# Altium PCB Digital Watch PCB.PcbDoc
Units mm, origin at the board's own origin, x right, y up, seen from the top; angles counter-clockwise.
Board outline 40 x 40 mm, 2 copper layers (Top Layer, Bottom Layer); 32 components, 24 nets, 122 pads, 2 vias.
Unrouted connection lines stored in the file: 58.
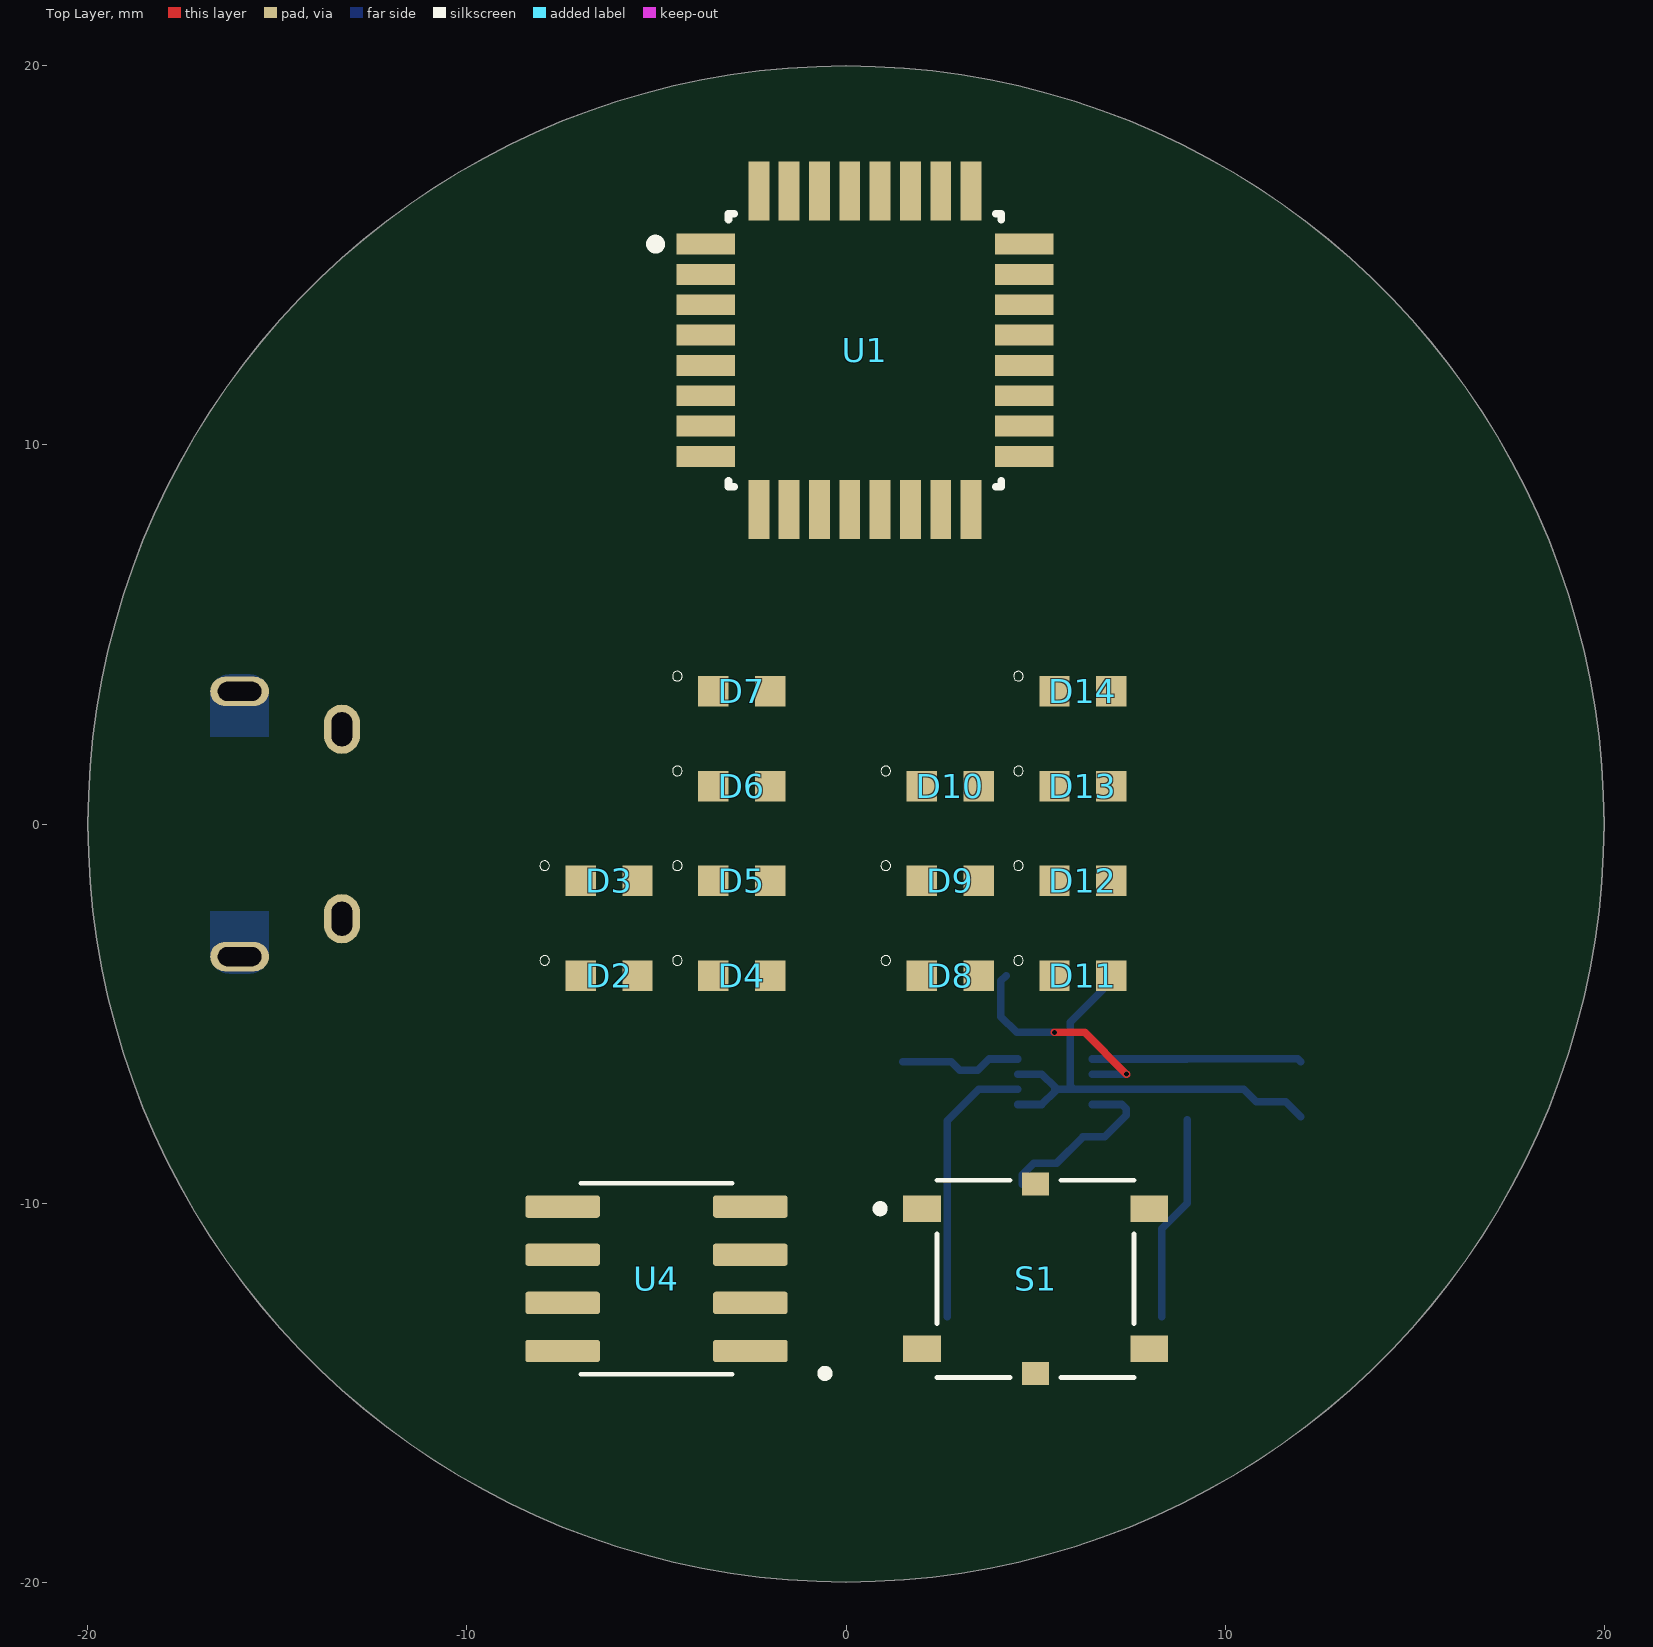
[diagram p0: Top Layer view]
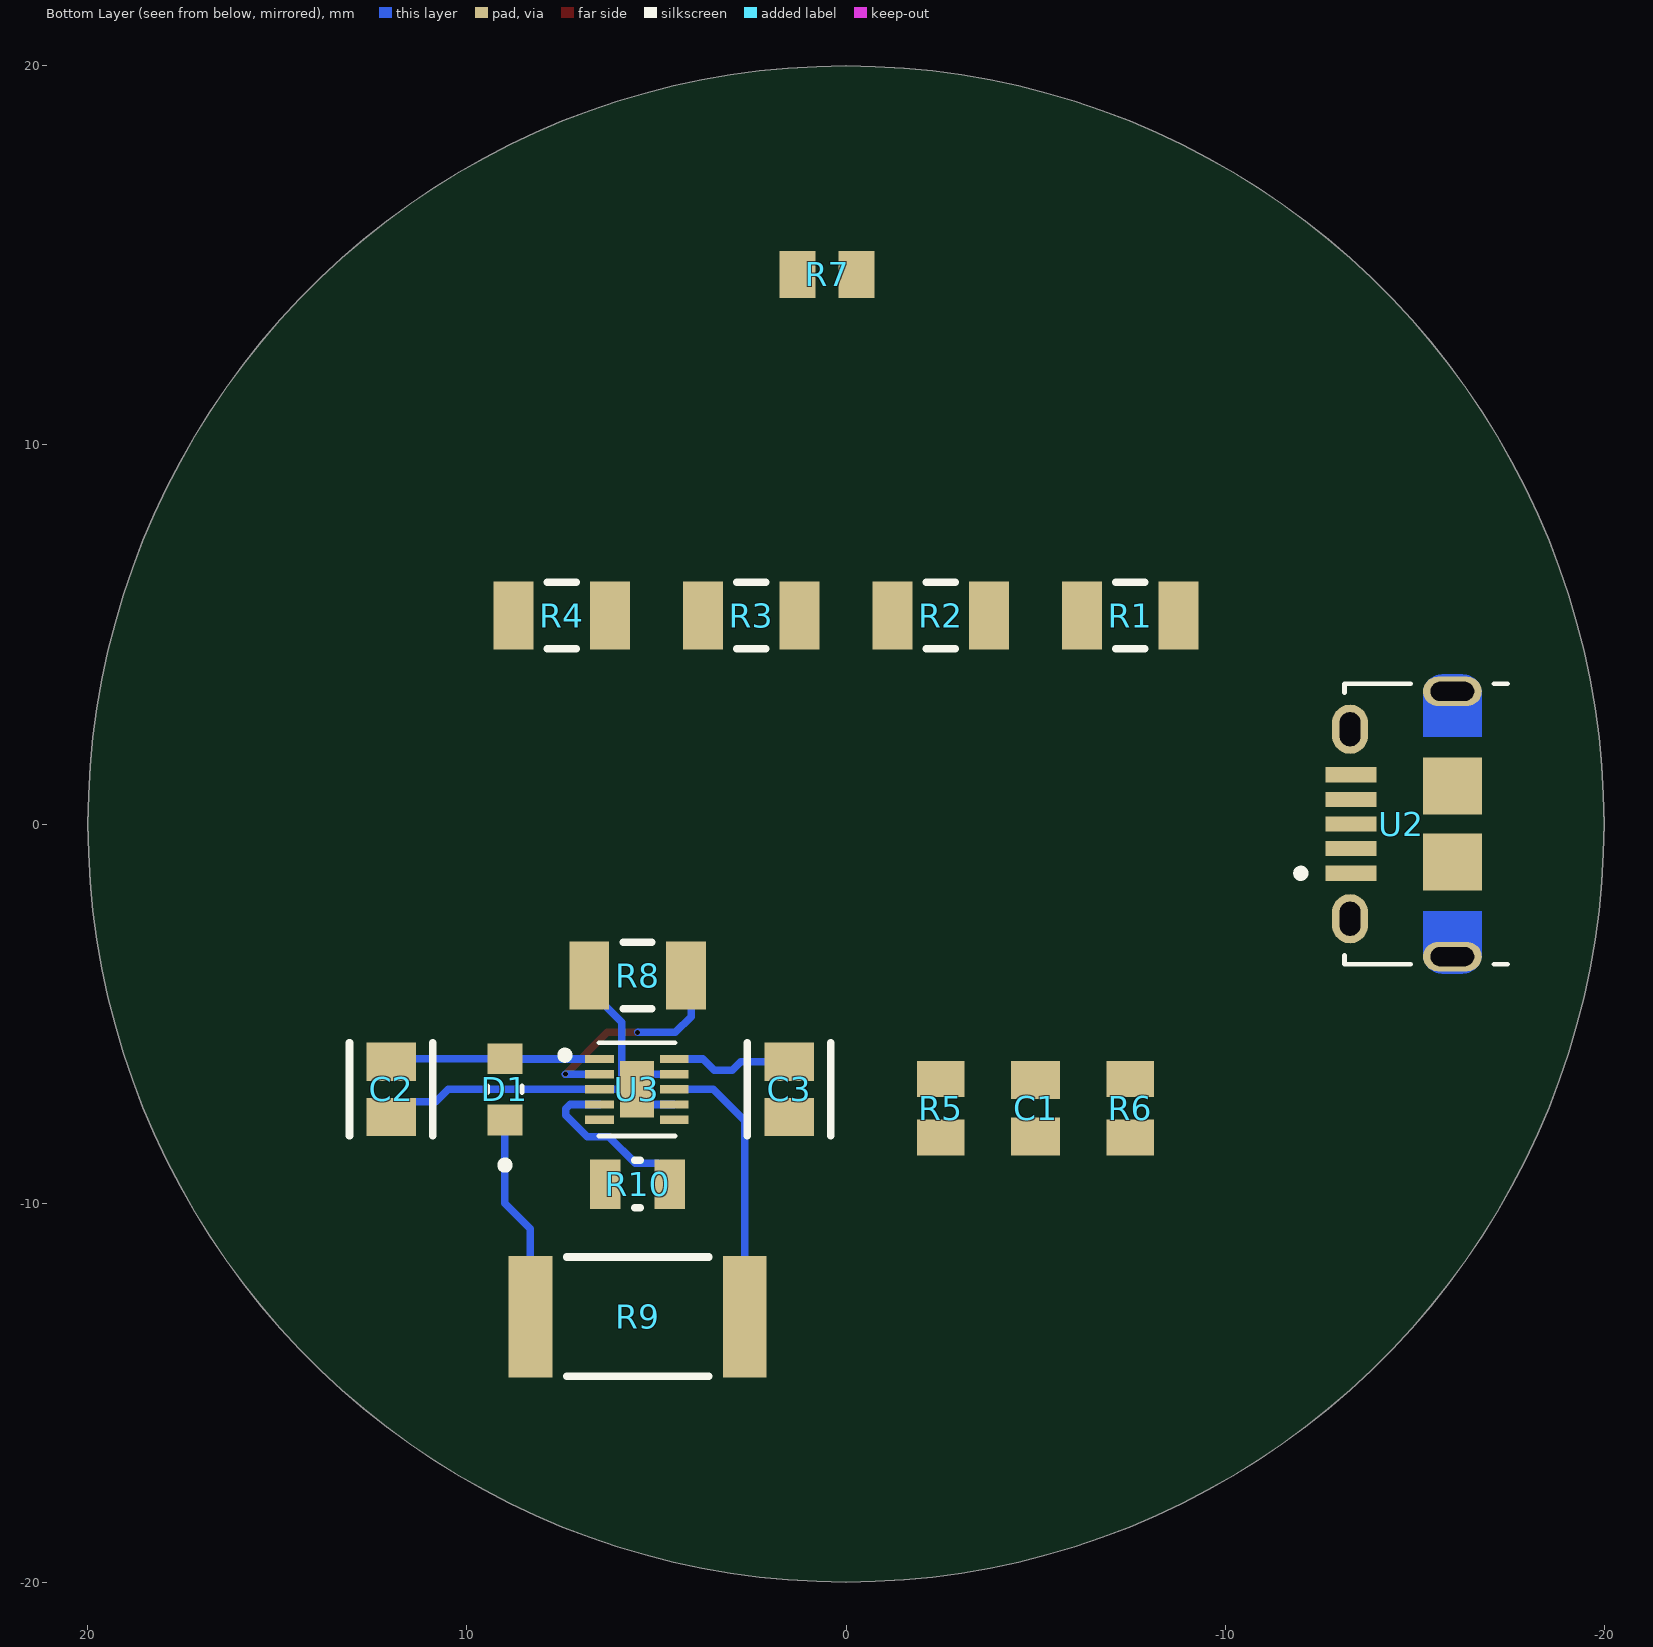
[diagram p1: Bottom Layer view, seen from below]

## Layer stack, top to bottom
Top Solder: solder mask 0.0102, Solder Resist, Dk 3.5
Top Layer: signal copper 0.0356
Dielectric 1: dielectric 0.32, FR-4, Dk 4.8
Bottom Layer: signal copper 0.0356
Bottom Solder: solder mask 0.0102, Solder Resist, Dk 3.5

## Board outline
0,-20 cw(c0,0) -20,0 cw(c0,0) 0,20 cw(c0,0) 20,0 cw(c0,0)

## Design rules (kind name [scope] priority, off if disabled: settings)
Clearance [All] p1: gap=0.1 ignorepadtopadclearanceinfootprint=FALSE
PolygonConnect [All] p1: connectstyle=Relief reliefconductorwidth=0.254 reliefentries=4 polygonreliefangle="90 Angle" airgapwidth=0.254
RoutingVias [All] p1: holewidth=0.711 width=1.27 viastyle="Through Hole" minholewidth=0.1 minwidth=0.1 maxholewidth=0.711 maxwidth=1.27
SolderMaskExpansion [All] p1: expansion=0.102 istentingtop=FALSE
Width [All] p1: maxlimit=1 minlimit=0.2 preferedwidth=0.254
30 further rules are at their usual default settings.

## Components (designator, comment, footprint, x,y, rotation, side; value= is the part's Value field where it differs from the comment)
C1 "1u" CAPC2013X135X45LL10T25 -5,-7.5 r270 bottom
C2 "10u" FP-GCM21B-0_15-IPC_C 12,-7 r270 bottom
C3 "10u" FP-GCM21B-0_15-IPC_C 1.5,-7 r270 bottom
D1 "LTST-C190KRKT" LEDC1608X35N 9,-7 r90 bottom
D2 "LTST-C190GKT" LEDM1608X80 -6.25,-4 r0 top locked
D3 "LTST-C190GKT" LEDM1608X80 -6.25,-1.5 r0 top locked
D4 "LTST-C190GKT" LEDM1608X80 -2.75,-4 r0 top locked
D5 "LTST-C190GKT" LEDM1608X80 -2.75,-1.5 r0 top locked
D6 "LTST-C190GKT" LEDM1608X80 -2.75,1 r0 top locked
D7 "LTST-C190GKT" LEDM1608X80 -2.75,3.5 r0 top locked
D8 "LTST-C190GKT" LEDM1608X80 2.75,-4 r0 top locked
D9 "LTST-C190GKT" LEDM1608X80 2.75,-1.5 r0 top locked
D10 "LTST-C190GKT" LEDM1608X80 2.75,1 r0 top locked
D11 "LTST-C190GKT" LEDM1608X80 6.25,-4 r0 top locked
D12 "LTST-C190GKT" LEDM1608X80 6.25,-1.5 r0 top locked
D13 "LTST-C190GKT" LEDM1608X80 6.25,1 r0 top locked
D14 "LTST-C190GKT" LEDM1608X80 6.25,3.5 r0 top locked
R1 "100" FP-CRCW1206-e3-MFG -7.5,5.5 r180 bottom
R2 "100" FP-CRCW1206-e3-MFG -2.5,5.5 r180 bottom
R3 "100" FP-CRCW1206-e3-MFG 2.5,5.5 r180 bottom
R4 "100" FP-CRCW1206-e3-MFG 7.5,5.5 r180 bottom
R5 "4.7" RESC2013X70X40LL20T20 -2.5,-7.5 r90 bottom
R6 "4.7" RESC2013X70X40LL20T20 -7.5,-7.5 r90 bottom
R7 "4.7" RESC2013X70X40LL20T20 0.5,14.5 r0 bottom
R8 "1.2k" FP-CRCW1206-e3-MFG 5.5,-4 r180 bottom
R9 "1k" FP-CRCW2512-e3-IPC_C 5.5,-13 r180 bottom
R10 "" FP-CRCW0805-e3-IPC_C 5.5,-9.5 r180 bottom
S1 "" SW_PTS526_SMG15_SMTR2_LFS 5,-12 r0 top locked
U1 "ATMEGA328PB-AUR" FP-C04-074-MFG 0.5,12.5 r0 top locked
U2 "10118194-0001LF" AMPHENOL_10118194-0001LF -16,0 r90 bottom locked
U3 "BQ24040DSQR" SON40P200X200X80-11N 5.515,-7 r180 bottom
U4 "DS3231MZ+" SOIC127P600X175-8N -5,-12 r180 top locked

## Footprints (in the part's own frame and the unit in brackets; to place one, negate y for a bottom-side part, rotate by r counter-clockwise, add the part's x,y. Pads: shape width x height; smd on the part's side, far side on the other; paste and mask are expansions set on the pad)
AMPHENOL_10118194-0001LF [mm]
  rect 0.4x1.35 smd: 1(-1.3,2.675) 2(-0.65,2.675) 3(0,2.675) 4(0.65,2.675) 5(1.3,2.675)
  oval 0.775x1.55 hole 0.5 slot 1.15 at 90 deg mask+0: SH1(-3.5,0) SH4(3.5,0)
  rect 1.5x1.55 smd: SH2(1,0) SH3(-1,0)
  oval 1.3x0.95 hole 0.55 slot 0.9 at 0 deg: SH5(-2.5,2.7) SH6(2.5,2.7)
  Top Layer region: 3.471,0.774 3.497,0.772 3.523,0.769 3.549,0.764 3.574,0.758 3.6,0.751 3.624,0.742 3.648,0.732 3.672,0.721 3.695,0.708 3.717,0.694 3.739,0.68 3.76,0.664 3.78,0.647 3.799,0.629 3.817,0.61 3.834,0.59 3.85,0.569 3.864,0.547 3.878,0.525 3.891,0.502 3.902,0.478 3.912,0.454 3.921,0.43 3.928,0.404 3.934,0.379 3.939,0.353 3.942,0.327 3.944,0.301 3.945,0.275 3.945,-0.275 3.944,-0.301 3.942,-0.327 3.939,-0.353 3.934,-0.379 3.928,-0.404 3.921,-0.43 3.912,-0.454 3.902,-0.478 3.891,-0.502 3.878,-0.525 3.864,-0.547 3.85,-0.569 3.834,-0.59 3.817,-0.61 3.799,-0.629 3.78,-0.647 3.76,-0.664 3.739,-0.68 3.717,-0.694 3.695,-0.708 3.672,-0.721 3.648,-0.732 3.624,-0.742 3.6,-0.751 3.574,-0.758 3.549,-0.764 3.523,-0.769 3.497,-0.772 3.471,-0.774 3.445,-0.775 2.3,-0.775 2.3,0.775 3.445,0.775
  Top Layer region: -2.3,-0.775 -3.445,-0.775 -3.471,-0.774 -3.497,-0.772 -3.523,-0.769 -3.549,-0.764 -3.574,-0.758 -3.6,-0.751 -3.624,-0.742 -3.648,-0.732 -3.672,-0.721 -3.695,-0.708 -3.717,-0.694 -3.739,-0.68 -3.76,-0.664 -3.78,-0.647 -3.799,-0.629 -3.817,-0.61 -3.834,-0.59 -3.85,-0.569 -3.864,-0.547 -3.878,-0.525 -3.891,-0.502 -3.902,-0.478 -3.912,-0.454 -3.921,-0.43 -3.928,-0.404 -3.934,-0.379 -3.939,-0.353 -3.942,-0.327 -3.944,-0.301 -3.945,-0.275 -3.945,0.275 -3.944,0.301 -3.942,0.327 -3.939,0.353 -3.934,0.379 -3.928,0.404 -3.921,0.43 -3.912,0.454 -3.902,0.478 -3.891,0.502 -3.878,0.525 -3.864,0.547 -3.85,0.569 -3.834,0.59 -3.817,0.61 -3.799,0.629 -3.78,0.647 -3.76,0.664 -3.739,0.68 -3.717,0.694 -3.695,0.708 -3.672,0.721 -3.648,0.732 -3.624,0.742 -3.6,0.751 -3.574,0.758 -3.549,0.764 -3.523,0.769 -3.497,0.772 -3.471,0.774 -3.445,0.775 -2.3,0.775
  silkscreen extent -3.7,-1.45 3.7,4.1, body extent -4.02,-2.68 4.02,2.85, height 2.67
CAPC2013X135X45LL10T25 [mm] "Chip Capacitor, 2-Leads, Body 2.00x1.25mm, IPC High Density"
  rect 1x1.3 smd: 1(-0.75,0) 2(0.75,0)
  body extent -1.05,-0.67 1.05,0.68, height 1.35
FP-C04-074-MFG [mm]
  rect 1.55x0.55 smd paste+0 mask+0: 1(-4.2,2.8) 2(-4.2,2) 3(-4.2,1.2) 4(-4.2,0.4) 5(-4.2,-0.4) 6(-4.2,-1.2) 7(-4.2,-2) 8(-4.2,-2.8) 17(4.2,-2.8) 18(4.2,-2) 19(4.2,-1.2) 20(4.2,-0.4) 21(4.2,0.4) 22(4.2,1.2) 23(4.2,2) 24(4.2,2.8)
  rect 0.55x1.55 smd paste+0 mask+0: 9(-2.8,-4.2) 10(-2,-4.2) 11(-1.2,-4.2) 12(-0.4,-4.2) 13(0.4,-4.2) 14(1.2,-4.2) 15(2,-4.2) 16(2.8,-4.2) 25(2.8,4.2) 26(2,4.2) 27(1.2,4.2) 28(0.4,4.2) 29(-0.4,4.2) 30(-1.2,4.2) 31(-2,4.2) 32(-2.8,4.2)
  silkscreen extent -5.65,-3.6 3.6,3.6, body extent -5.07,-5.07 5.07,5.07, height 0.25
FP-CRCW0805-e3-IPC_C [mil]
  rect 31.75x51.5 smd paste+0 mask+0: 1(-33.5,0) 2(33.5,0)
  silkscreen extent -3,-25 3,25, body extent -39,-25 39,25, height 20
FP-CRCW1206-e3-MFG [mm]
  rect 1.05x1.8 smd paste+0 mask+0: 1(-1.275,0) 2(1.275,0)
  silkscreen extent -0.38,-0.87 0.38,0.87, body extent -1.6,-0.8 1.6,0.8, height 0.6
FP-CRCW2512-e3-IPC_C [mm]
  rect 1.155x3.208 smd paste+0 mask+0: 1(-2.826,0) 2(2.826,0)
  silkscreen extent -1.87,-1.58 1.87,1.58, body extent -3.15,-1.58 3.15,1.58, height 0.7
FP-GCM21B-0_15-IPC_C [mm]
  rect 1.006x1.308 smd paste+0 mask+0: 1(-0.726,0) 2(0.726,0)
  silkscreen extent -1.23,-1.1 1.23,1.1, body extent -1,-0.63 1,0.63, height 1.4
LEDC1608X35N [mm]
  rect 0.81x0.93 smd: A(0.81,0) C(-0.81,0)
  silkscreen extent -2.1,-0.45 0.09,0.45, body extent -0.8,-0.4 0.8,0.4, height 0.8
LEDM1608X80 [mm]
  rect 0.8x0.8 smd: A(0.75,0) C(-0.75,0)
  silkscreen extent -1.83,0.27 -1.57,0.53, body extent -0.8,-0.4 0.8,0.4, height 0.8
RESC2013X70X40LL20T20 [mm] "Chip Resistor, 2-Leads, Body 2.2x1.35mm, IPC High Density"
  rect 0.95x1.25 smd: 1(-0.775,0) 2(0.775,0)
  body extent -1.1,-0.67 1.1,0.67, height 0.7
SOIC127P600X175-8N [mm]
  rrect25% 1.97x0.59 smd: 1(-2.475,1.905) 2(-2.475,0.635) 3(-2.475,-0.635) 4(-2.475,-1.905) 5(2.475,-1.905) 6(2.475,-0.635) 7(2.475,0.635) 8(2.475,1.905)
  silkscreen extent -4.54,-2.52 2,2.59, body extent -3,-2.45 3,2.45, height 1.51
SON40P200X200X80-11N [mm]
  rect 0.76x0.22 smd: 1(-0.985,0.8) 2(-0.985,0.4) 3(-0.985,0) 4(-0.985,-0.4) 5(-0.985,-0.8) 6(0.985,-0.8) 7(0.985,-0.4) 8(0.985,0) 9(0.985,0.4) 10(0.985,0.8)
  rect 0.9x1.5 smd paste-2: 11(0,0)
  silkscreen extent -2,-1.23 1,1.23, body extent -1,-1 1,1, height 0.76
SW_PTS526_SMG15_SMTR2_LFS [mm]
  rect 1x0.7 smd: 1(-3,1.85) 2(3,1.85) 3(-3,-1.85) 4(3,-1.85)
  rect 0.7x0.6 smd: G1(0,2.5) G2(0,-2.5)
  silkscreen extent -4.2,-2.6 2.6,2.6, body extent -3.2,-2.6 3.2,2.6, height 1.7

## Part data
C1: library part CMP-2007-03460-1, Manufacturer=Murata, Part Number=GRM21BR71C105KA01K
C2 C3: library part CMP-2007-03335-2, "Ceramic Capacitor for Automotive 10uF ±10% 6.3VDC X7R 0805 Embossed T/R", Capacitance=10uF, Case Code (Imperial)=0805, Case Code (Metric)=2012, Dielectric=X7R, Max Operating Temperature=125°C, Min Operating Temperature=-55°C, Package Quantity=1, Ratings=AEC-Q200, Tolerance=10%, Voltage=6.3V, Case/Package=0805, Depth=1.25mm, Height=1.25mm, Lead Free="Lead Free", Length=2mm, Mount="Surface Mount", Packaging="Tape and Reel", Radiation Hardening=No, REACH SVHC="No SVHC", Termination=SMD/SMT, Thickness=0.055inch, Voltage Rating=6.3V, Voltage Rating (DC)=6.3V, Width=0.049inch
D1: "Red 631nm LED Indication - Discrete 2V 0603 (1608 Metric)", Package="0603 Lite-On", Availability="In Stock", Check_prices=https://www.snapeda.com/parts/LTST-C190KRKT/Lite-On+Inc./view-part/?ref=eda, MF="Lite-On Inc.", MP=LTST-C190KRKT, Price=None, Purchase-URL=https://pricing.snapeda.com/search/part/LTST-C190KRKT/?ref=eda, SnapEDA_Link=https://www.snapeda.com/parts/LTST-C190KRKT/Lite-On+Inc./view-part/?ref=snap
D2 D3 D4 D5 D6 D7 D8 D9 D10 D11 D12 D13 D14: "Green 1.6 x 0.8 x 0.8 mm 130Â° Water Clear 6 mcd 2.1 V SMT LED", Package=None, Availability=Unavailable, MP=LTST-C190GKT, Price=None
R1 R2 R3 R4: library part CMP-2003-04801-2, "RES Thick Film, 100Ω, 1%, 0.25W, 100ppm/°C, 1206", Case Code (Imperial)=1206, Case Code (Metric)=3216, Max Operating Temperature=155°C, Min Operating Temperature=-55°C, Package Quantity=5000, Power Rating=250mW, Resistance=100R, Temperature Coefficient=100ppm/°C, Tolerance=1%, Voltage Rating=200V, Case/Package=1206, Composition="Thick Film", Contact Plating=Tin, Depth=1.6mm, Height=0.55mm, Lead Free="Lead Free", Length=3.2mm, Military Standard=Not, Mount="Surface Mount", Number of Pins=2, Packaging="Tape and Reel", Radiation Hardening=No, Termination=SMD/SMT, Voltage Rating (DC)=200V, Weight=0.000353oz, Width=1.6mm
R5 R6 R7: library part CMP-1665-00033-1, "Chip Resistor, 4.7 Ohm, +/- 1%, 125 mW, -55 to 125 degC, 0805 (2012 Metric), RoHS, Tape and Reel", Case Code (Imperial)=0805, Case Code (Metric)=2012, Max Operating Temperature="125 degC", Min Operating Temperature="-55 degC", Package Quantity=5000, PartNumber=ERJ-6RQF4R7V, Power Rating="125 mW", Resistance="4.7 Ohm", Tolerance=1%, Case\/Package=0805, ComponentLink1Description="Manufacturer URL", ComponentLink1URL=http://www.panasonic.com/, ComponentLink2Description=Datasheet, ComponentLink2URL=http://industrial.panasonic.com/cdbs/www-data/pdf/RDA0000/AOA0000C86.pdf, DatasheetVersion=04/2015, Height="0.028 inch", Length="0.079 inch", Mount="Surface Mount", Mounting Technology="Surface Mount", PackageDescription="2-Pin Surface Mount Device, Body 2 x 1.5 mm", PackageReference=0805, Packaging="Tape and Reel", Pins=2, Radiation Hardening=No, REACH SVHC="No SVHC", RoHSCompliant=true, Width="0.049 inch"
R8: library part CMP-2003-01876-2, "RES Thick Film, 1.2kΩ, 1%, 0.25W, 100ppm/°C, 1206", Case Code (Imperial)=1206, Case Code (Metric)=3216, Max Operating Temperature=155°C, Max Power Dissipation=250mW, Min Operating Temperature=-55°C, Package Quantity=10, Resistance=1.2kR, Temperature Coefficient=100ppm/°C, Tolerance=1%, Voltage Rating=200V, Case/Package=1206, Composition="Thick Film", Contact Plating=Tin, Depth=1.6mm, Features="Automotive AEC-Q200", Height=0.55mm, Lead Free="Lead Free", Length=3.2mm, Military Standard=Not, Number of Terminations=2, Packaging="Tape and Reel", Power Rating=250mW, Radiation Hardening=No, Termination=SMD/SMT, Voltage Rating (DC)=200V, Weight=0.000353oz, Width=0.063inch, Working Voltage=200V
R9: library part CMP-02407-005880-1, "RES Thick Film, 1kΩ, 1%, 1W, 100ppm/°C, 2512", Case Code (Imperial)=2512, Case Code (Metric)=6432, Max Operating Temperature=155°C, Max Power Dissipation=1W, Min Operating Temperature=-55°C, Package Quantity=10, Resistance=1kR, Temperature Coefficient=100ppm/°C, Tolerance=1%, Voltage Rating=500V, Case/Package=2512, Composition="Thick Film", Contact Plating=Tin, Depth=3.15mm, Features="Automotive AEC-Q200", Height=0.6mm, Lead Free="Lead Free", Length=6.3mm, Military Standard=Not, Mount="Surface Mount", Number of Pins=2, Number of Terminations=2, Packaging="Tape and Reel", Power Rating=1W, Radiation Hardening=No, Termination=SMD/SMT, Voltage Rating (DC)=500V, Weight=0.001429oz, Width=3.15mm
R10: library part CMP-2001-04910-2, "RES Thick Film, 10kΩ, 5%, 0.125W, 200ppm/°C, 0805", Case Code (Imperial)=0805, Case Code (Metric)=2012, Max Operating Temperature=155°C, Min Operating Temperature=-55°C, Package Quantity=5000, Power Rating=125mW, Resistance=10kR, Temperature Coefficient=200ppm/°C, Tolerance=5%, Voltage Rating=150V, Case/Package=0805, Composition="Thick Film", Contact Plating=Tin, Depth=1.25mm, Height=0.45mm, Lead Free="Lead Free", Length=2mm, Military Standard=Not, Mount="Surface Mount", Packaging="Tape and Reel", Radiation Hardening=No, Termination=SMD/SMT, Voltage Rating (DC)=150V, Weight=0.000194oz, Width=1.25mm
S1: library part PTS526_SMG15_SMTR2_LFS, "Tactile Switch SPST-NO Top Actuated Surface Mount", Package=None, Availability="In Stock", Check_prices=https://www.snapeda.com/parts/PTS526%20SMG15%20SMTR2%20LFS/C%2526K/view-part/?ref=eda, MF=C&K, MP="PTS526 SMG15 SMTR2 LFS", Price=None, Purchase-URL="https://pricing.snapeda.com/search/part/PTS526 SMG15 SMTR2 LFS/?ref=eda", SnapEDA_Link=https://www.snapeda.com/parts/PTS526%20SMG15%20SMTR2%20LFS/C%2526K/view-part/?ref=snap
U1: library part CMP-06276-000006-1, "IC MCU 8BIT 32KB FLASH 32TQFP", Frequency=20MHz, Manufacturer=Microchip, Max Supply Voltage=5.5V, Min Supply Voltage=1.8V, Nominal Supply Current=0.06-5.2mA, Package=C04-074, Temperature="-40°C to +85°C", Temperature Range High=+85°C, Temperature Range Low=-40°C, Automotive=No, Category=IC, ComponentLink2Description=Datasheet, ComponentLink2URL=http://ww1.microchip.com/downloads/en/DeviceDoc/40001906C.pdf, Core Architecture=AVR, Data Bus Width=8bits, Device Class L1="Integrated Circuits (ICs)", Device Class L2="Embedded Processors and Controllers", Device Class L3=Microcontrollers, Digikey Description="IC MCU 8BIT 32KB FLASH 32TQFP", Footprint Url=https://ww1.microchip.com/downloads/en/DeviceDoc/32L_TQFP_7x7x1_0mm_PT_C04-00074c.pdf, Height=1.2mm, Interface=I2C,SPI,UART,USART,2-Wire, Ipc Land Pattern Name=QFP80P900X900X120-32, Lead Free=Yes, Manufacturer Part Number=ATMEGA328PB-AUR, Memory Size=32KBytes, Memory Type=FLASH, Number Of A/D Converters=1, Number Of Adc Channels=8, Number Of Cores=1, Number Of I2C Channels=2, Number Of I/Os=27, Number Of Pwm Channels=10, Number Of Spi Channels=2, Number Of Timers/Counters=5, Number Of Uart Channels=2, Octopart=https://octopart.com/atmega328pb-aur-microchip-77760229, Ram Size=2KBytes, RoHS=TRUE, Standoff Height=0.05mm
U2: "Micro USB, Input Output Connectors, B TYPE RECEPTACLE with flange", Package=None, Check_prices=https://www.snapeda.com/parts/10118194-0001LF/Amphenol+FCI/view-part/?ref=eda, MF="Amphenol ICC", MP=10118194-0001LF, SnapEDA_Link=https://www.snapeda.com/parts/10118194-0001LF/Amphenol+FCI/view-part/?ref=snap
U3: "Standalone 1-cell 1-A linear battery charger with 4.2-V VBAT and Temperature Sensing 10-WSON 0 to 125", Package="WSON-10 Texas Instruments", Digi-Key_Part_Number=296-37142-1-ND, DigiKey-Purchase-URL=https://snapeda.com/shop?store=DigiKey&id=229310, MF="Texas Instruments", Mouser-Purchase-URL=https://snapeda.com/shop?store=Mouser&id=229310, MP=BQ24040DSQR, SnapEDA_Link=https://www.snapeda.com/parts/BQ24040DSQR/Texas%20Instruments/view-part/229310/?ref=snap, Texas_Instruments-Purchase-URL=https://snapeda.com/shop?store=Texas+Instruments&id=229310
U4: "Real Time Clock _RTC_ IC Clock/Calendar IÂ²C, 2-Wire Serial 8-SOIC _0.154, 3.90mm Width_", Package="SOIC-8 Maxim Integrated", Availability=Unavailable, MF="Maxim Integrated", MP=DS3231MZ, Price=None, SnapEDA_Link=https://www.snapeda.com/parts/DS3231MZ/Maxim%20Integrated/view-part/2834343/?ref=snap

## Via types
v1: diameter 0.127, hole 0.127, Top Layer to Bottom Layer, 2 vias

## Nets (pads, with @x,y where several pads share a name; then routed paths per layer and width w, separated by ;. In a path a pad name is that pad's centre, name@x,y a point inside that pad or via, vN(x,y) a via of type N, cw(c..) or ccw(c..) an arc to the next point about the centre after c; other vN are vias at no path point)
+5V: C2.1 D1.A U2.1 U3.1 | length 5.5
  Bottom Layer w0.2: U3.1 8.99,-6.2 D1.A 11.916,-6.19 C2.1
BIT1: R1.2 U1.11
BIT2: R2.2 U1.12
BIT3: R3.2 U1.13
BIT4: R4.2 U1.14
GND: C1.2 C2.2 C3.2 R8.1 R10.1 S1.3 S1.G2 U1.5 U1.21 U2.5 U2.SH1 U2.SH2 U2.SH3 U2.SH4 U2.SH5 U2.SH6 U3.3 U3.7 U3.9 U3.11 U4.2 U4.5 | length 12.5
  Bottom Layer w0.2: U3.7 5.165,-7.4 5.515,-7.05 U3.11 ; U3.9 5.165,-6.6 5.515,-6.95 U3.11 ; R8.1 6.775,-4.375 5.92,-5.23 5.92,-6.912 6.008,-7 ; C2.2 11.597,-7.323 10.823,-7.323 10.5,-7 U3.3 6.008,-7 ; U3.11 6.008,-7
H0: D4.A D5.A D6.A D7.A U1.2
H1: D2.A D3.A U1.1
M0: D11.A D12.A D13.A D14.A U1.10
M1: D8.A D9.A D10.A U1.9
NetC3_1: C3.1 U3.10 | length 3.2
  Bottom Layer w0.2: C3.1 2.774,-6.274 3,-6.5 3.48,-6.5 3.78,-6.2 U3.10
NetD1_C: D1.C R9.1 | length 5.5
  Bottom Layer w0.2: R9.1 8.326,-10.674 9,-10 D1.C
NetD2_C: D2.C D4.C D8.C D11.C R1.1
NetD3_C: D3.C D5.C D9.C D12.C R2.1
NetD6_C: D6.C D10.C D13.C R3.1
NetD7_C: D7.C D14.C R4.1
NetR8_2: R8.2 U3.2 | length 6
  Top Layer w0.2: v1(5.5,-5.5) 6.3,-5.5 v1(7.4,-6.6)
  Bottom Layer w0.2: R8.2 4.083,-4.142 4.083,-5.083 4.5,-5.5 v1(5.5,-5.5) ; U3.2 v1(7.4,-6.6)
NetR9_2: R9.2 U3.8 | length 7.4
  Bottom Layer w0.2: R9.2 2.674,-7.826 3.5,-7 U3.8
NetR10_2: R10.2 U3.4 | length 4.7
  Bottom Layer w0.2: R10.2 4.649,-9.249 4.952,-8.946 5.554,-8.946 6.254,-8.246 6.826,-8.246 7.39,-7.683 7.39,-7.517 7.273,-7.4 U3.4
NetS1_1: S1.1 U1.32
RST: R7.1 U1.29
SCL: R6.1 U1.28 U4.8
SDA: R5.1 U1.27 U4.7
VCC: C1.1 R5.2 R6.2 R7.2 U1.18 U4.6
pads on no net: S1.2 S1.4 S1.G1 U1.3 U1.4 U1.6 U1.7 U1.8 U1.15 U1.16 U1.17 U1.19 U1.20 U1.22 U1.23 U1.24 U1.25 U1.26 U1.30 U1.31 U2.2 U2.3 U2.4 U3.5 U3.6 U4.1 U4.3 U4.4

## Silkscreen, mask and mechanical layers (free items; w line width, h text height)
Mechanical 1:
  circle w0.025: c0,0 r20

## Text inside footprints (layer, text, board x,y; h text height)
U2: Mechanical 13 "PCB EDGE" at -17.25,4.25 h0.81 r270